# Altium PCB Adapter24.PcbDoc
Units mil, origin at the board's own origin, x right, y up, seen from the top; angles counter-clockwise.
Board outline 1000 x 2595 mil, 2 copper layers (Top Layer, Bottom Layer); 6 components, 50 nets, 100 pads, 0 vias.
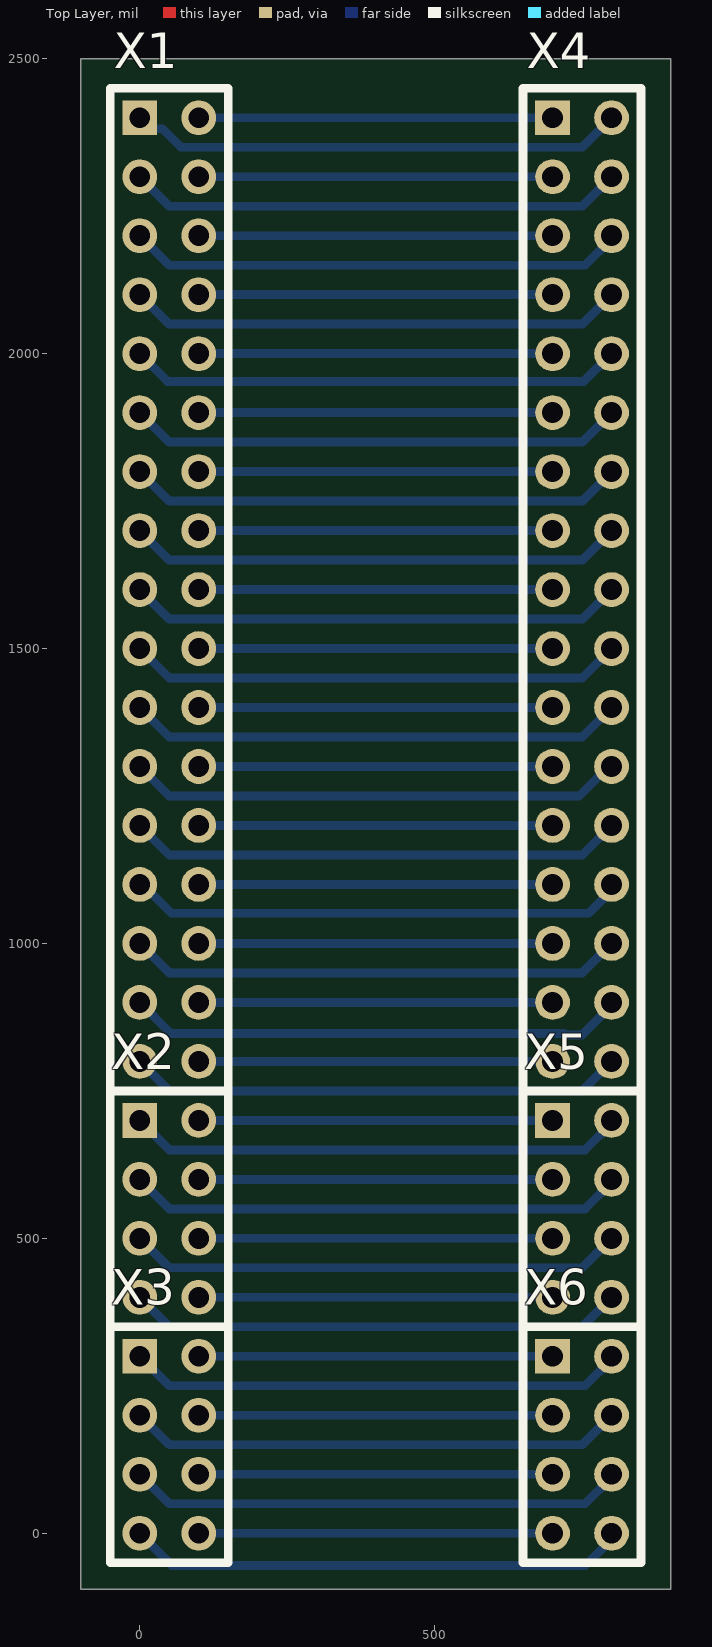
[diagram p0: Top Layer view]
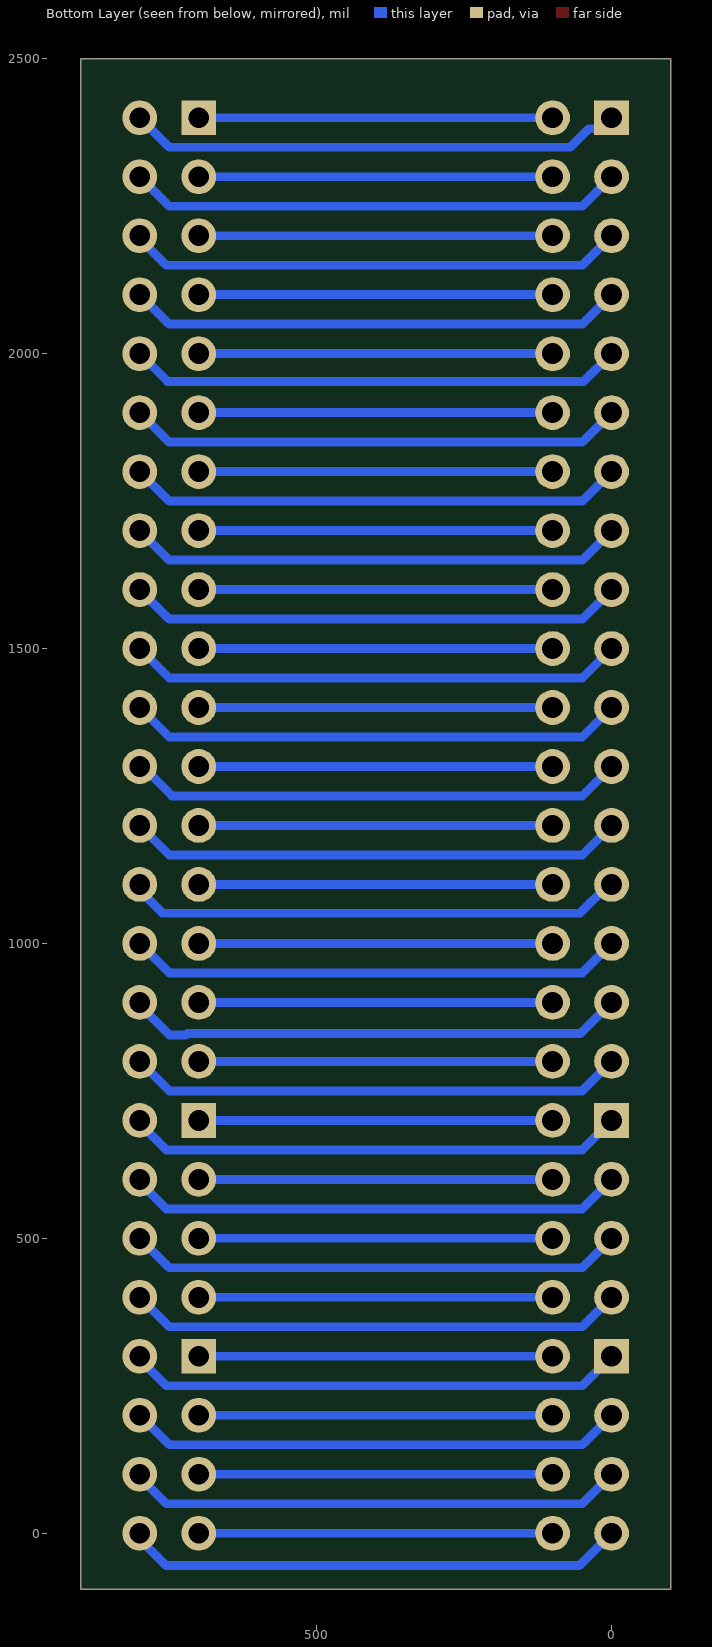
[diagram p1: Bottom Layer view, seen from below]
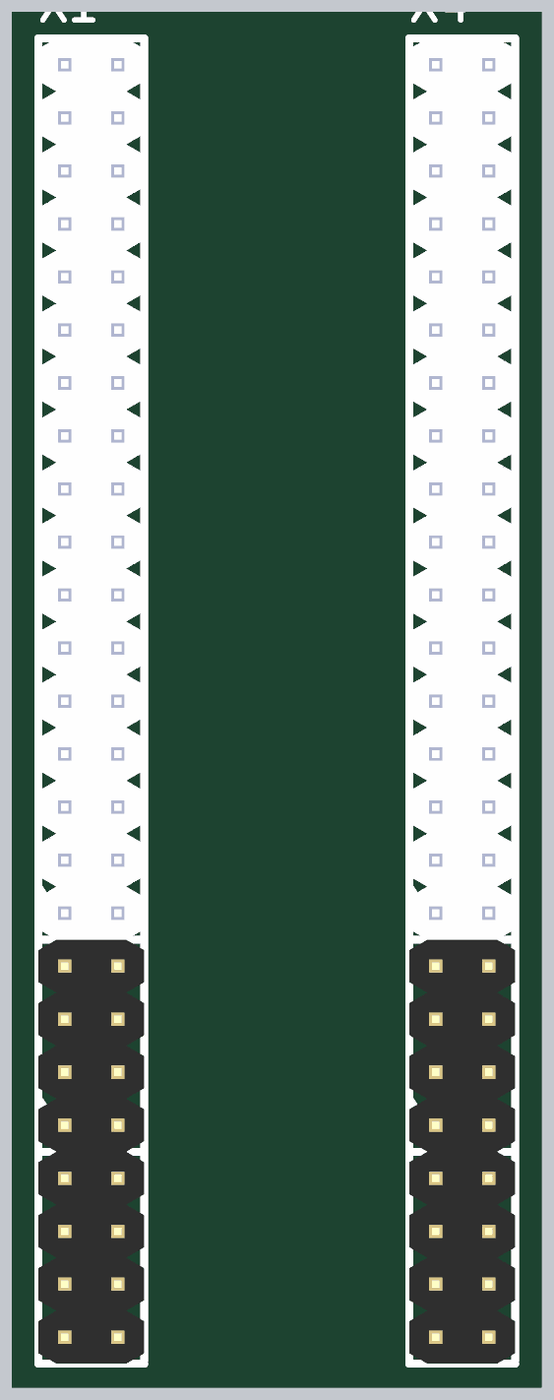
[diagram p2: 3D render of the assembled board from above, using the file's embedded part models]

## Layer stack, top to bottom
Top Solder: solder mask 0.4, Solder Resist, Dk 3.5
Top Layer: signal copper 1.4
Dielectric 1: dielectric 12.6, FR-4, Dk 4.8
Bottom Layer: signal copper 1.4
Bottom Solder: solder mask 0.4, Solder Resist, Dk 3.5

## Board outline
-100,-95 -100,2500 900,2500 900,-95

## Design rules (kind name [scope] priority, off if disabled: settings)
Clearance [All] p1: gap=10 ignorepadtopadclearanceinfootprint=FALSE
PolygonConnect [All] p1: connectstyle=Relief reliefconductorwidth=10 reliefentries=4 polygonreliefangle="90 Angle" airgapwidth=10
RoutingVias [All] p1: holewidth=28 width=50 viastyle="Through Hole" minholewidth=28 minwidth=50 maxholewidth=28 maxwidth=50
SolderMaskExpansion [All] p1: expansion=4 istentingtop=FALSE
Width [All] p1: maxlimit=25 minlimit=15 preferedwidth=15 minimp=50.000000 maximp=50.000000 favimp=50.000000
30 further rules are at their usual default settings.

## Components (designator, comment, footprint, x,y, rotation, side; value= is the part's Value field where it differs from the comment)
X1 "PLD-34" PLD-34 50,1600 r0 top locked
X2 "PLD-8" PLD-8 50,550 r0 top
X3 "PLD-8" PLD-8 50,150 r0 top
X4 "PLD-34" PLD-34 750,1600 r0 top locked
X5 "PLD-8" PLD-8 750,550 r0 top
X6 "PLD-8" PLD-8 750,150 r0 top

## Footprints (in the part's own frame and the unit in brackets; to place one, negate y for a bottom-side part, rotate by r counter-clockwise, add the part's x,y. Pads: shape width x height; smd on the part's side, far side on the other; paste and mask are expansions set on the pad)
PLD-8 [mm] "Штыри на плату,  шаг 2.54мм., двухрядные"
  rect 1.5x1.5 hole 0.9: 1(-1.27,3.81)
  round 1.5 hole 0.9: 2(1.27,3.81) 3(-1.27,1.27) 4(1.27,1.27) 5(-1.27,-1.27) 6(1.27,-1.27) 7(-1.27,-3.81) 8(1.27,-3.81)
  silkscreen extent -2.54,-5.08 2.54,5.08, body extent -2.54,-5.08 2.54,5.08, height 8.81
PLD-34 [mm]
  rect 1.5x1.5 hole 0.9: 1(-1.27,20.32)
  round 1.5 hole 0.9: 2(1.27,20.32) 3(-1.27,17.78) 4(1.27,17.78) 5(-1.27,15.24) 6(1.27,15.24) 7(-1.27,12.7) 8(1.27,12.7) 9(-1.27,10.16) 10(1.27,10.16) 11(-1.27,7.62) 12(1.27,7.62) 13(-1.27,5.08) 14(1.27,5.08) 15(-1.27,2.54) 16(1.27,2.54) 17(-1.27,0) 18(1.27,0) 19(-1.27,-2.54) 20(1.27,-2.54) 21(-1.27,-5.08) 22(1.27,-5.08) 23(-1.27,-7.62) 24(1.27,-7.62) 25(-1.27,-10.16) 26(1.27,-10.16) 27(-1.27,-12.7) 28(1.27,-12.7) 29(-1.27,-15.24) 30(1.27,-15.24) 31(-1.27,-17.78) 32(1.27,-17.78) 33(-1.27,-20.32) 34(1.27,-20.32)
  silkscreen extent -2.54,-21.59 2.54,21.59, body extent -2.54,-21.59 2.54,21.59, height 8.8

## Part data
X1 X4: "Штыри на плату, шаг 2,54мм, двухрядные", ManufacturerPartNumber=PLD-34, Type=Вилка
X2 X3 X5 X6: "Штыри на плату шаг 2.54мм., двухрядные", Manufacturer="Бурый Медведь", ManufacturerPartNumber=PLD-8, SymAuthor="Календарова В.", Type=Розетка

## Nets (pads, with @x,y where several pads share a name; then routed paths per layer and width w, separated by ;. In a path a pad name is that pad's centre, name@x,y a point inside that pad or via, vN(x,y) a via of type N, cw(c..) or ccw(c..) an arc to the next point about the centre after c; other vN are vias at no path point)
NetX1_1: X1.1 X4.2 | length 841.4
  Bottom Layer w15: X1.1 18.67,2381.33 38.67,2381.33 70,2350 750,2350 X4.2
NetX1_2: X1.2 X4.1 | length 600
  Bottom Layer w15: X1.2 X4.1
NetX1_3: X1.3 X4.4 | length 841.4
  Bottom Layer w15: X1.3 50,2250 750,2250 X4.4
NetX1_4: X1.4 X4.3 | length 600
  Bottom Layer w15: X1.4 X4.3
NetX1_5: X1.5 X4.6 | length 844.4
  Bottom Layer w15: X1.5 50,2150 755,2150 800,2195 X4.6
NetX1_6: X1.6 X4.5 | length 600
  Bottom Layer w15: X1.6 X4.5
NetX1_7: X1.7 X4.8 | length 841.4
  Bottom Layer w15: X1.7 50,2050 750,2050 X4.8
NetX1_8: X1.8 X4.7 | length 600
  Bottom Layer w15: X1.8 X4.7
NetX1_9: X1.9 X4.10 | length 839
  Bottom Layer w15: X1.9 47.03,1952.97 752.97,1952.97 X4.10
NetX1_10: X1.10 X4.9 | length 600
  Bottom Layer w15: X1.10 X4.9
NetX1_11: X1.11 X4.12 | length 841.4
  Bottom Layer w15: X1.11 50,1850 750,1850 X4.12
NetX1_12: X1.12 X4.11 | length 600
  Bottom Layer w15: X1.12 X4.11
NetX1_13: X1.13 X4.14 | length 841.4
  Bottom Layer w15: X1.13 50,1750 750,1750 X4.14
NetX1_14: X1.14 X4.13 | length 600
  Bottom Layer w15: X1.14 X4.13
NetX1_15: X1.15 X4.16 | length 841.4
  Bottom Layer w15: X1.15 50,1650 750,1650 X4.16
NetX1_16: X1.16 X4.15 | length 600
  Bottom Layer w15: X1.16 X4.15
NetX1_17: X1.17 X4.18 | length 841.4
  Bottom Layer w15: X1.17 50,1550 750,1550 X4.18
NetX1_18: X1.18 X4.17 | length 600
  Bottom Layer w15: X1.18 X4.17
NetX1_19: X1.19 X4.20 | length 841.4
  Bottom Layer w15: X1.19 50,1450 750,1450 X4.20
NetX1_20: X1.20 X4.19 | length 600
  Bottom Layer w15: X1.20 X4.19
NetX1_21: X1.21 X4.22 | length 841.4
  Bottom Layer w15: X1.21 50,1350 750,1350 X4.22
NetX1_22: X1.22 X4.21 | length 600
  Bottom Layer w15: X1.22 X4.21
NetX1_23: X1.23 X4.24 | length 841.4
  Bottom Layer w15: X1.23 50,1250 745,1250 795,1300 X4.24
NetX1_24: X1.24 X4.23 | length 600
  Bottom Layer w15: X1.24 X4.23
NetX1_25: X1.25 X4.26 | length 841.4
  Bottom Layer w15: X1.25 50,1150 750,1150 X4.26
NetX1_26: X1.26 X4.25 | length 600
  Bottom Layer w15: X1.26 X4.25
NetX1_27: X1.27 X4.28 | length 846.3
  Bottom Layer w15: X1.27 5,1100 53.79,1051.21 761.21,1051.21 800,1090 X4.28
NetX1_28: X1.28 X4.27 | length 600
  Bottom Layer w15: X1.28 X4.27
NetX1_29: X1.29 X4.30 | length 841.4
  Bottom Layer w15: X1.29 50,950 750,950 X4.30
NetX1_30: X1.30 X4.29 | length 600
  Bottom Layer w15: X1.30 X4.29
NetX1_31: X1.31 X4.32 | length 848.5
  Bottom Layer w15: X1.31 52.97,847.03 719.48,847.03 721.51,845 750,845 800,895 X4.32
NetX1_32: X1.32 X4.31 | length 600
  Bottom Layer w15: X1.32 X4.31
NetX1_33: X1.33 X4.34 | length 841.4
  Bottom Layer w15: X1.33 50,750 750,750 X4.34
NetX1_34: X1.34 X4.33 | length 600
  Bottom Layer w15: X1.34 X4.33
NetX2_1: X2.1 X5.2 | length 844.4
  Bottom Layer w15: X2.1 50,650 755,650 800,695 X5.2
NetX2_2: X2.2 X5.1 | length 600
  Bottom Layer w15: X2.2 X5.1
NetX2_3: X2.3 X5.4 | length 844.4
  Bottom Layer w15: X2.3 50,550 755,550 800,595 X5.4
NetX2_4: X2.4 X5.3 | length 600
  Bottom Layer w15: X2.4 X5.3
NetX2_5: X2.5 X5.6 | length 841.4
  Bottom Layer w15: X2.5 50,450 750,450 X5.6
NetX2_6: X2.6 X5.5 | length 600
  Bottom Layer w15: X2.6 X5.5
NetX2_7: X2.7 X5.8 | length 841.4
  Bottom Layer w15: X2.7 50,350 750,350 X5.8
NetX2_8: X2.8 X5.7 | length 600
  Bottom Layer w15: X2.8 X5.7
NetX3_1: X3.1 X6.2 | length 844.4
  Bottom Layer w15: X3.1 50,250 755,250 800,295 X6.2
NetX3_2: X3.2 X6.1 | length 600
  Bottom Layer w15: X3.2 X6.1
NetX3_3: X3.3 X6.4 | length 841.4
  Bottom Layer w15: X3.3 50,150 750,150 X6.4
NetX3_4: X3.4 X6.3 | length 600
  Bottom Layer w15: X3.4 X6.3
NetX3_5: X3.5 X6.6 | length 844.4
  Bottom Layer w15: X3.5 50,50 755,50 800,95 X6.6
NetX3_6: X3.6 X6.5 | length 600
  Bottom Layer w15: X3.6 X6.5
NetX3_7: X3.7 X6.8 | length 851.4
  Bottom Layer w15: X3.7 55,-55 755,-55 800,-10 X6.8
NetX3_8: X3.8 X6.7 | length 600
  Bottom Layer w15: X3.8 X6.7

## Silkscreen, mask and mechanical layers (free items; w line width, h text height)
Mechanical 15:
  the board outline again, w10